# EAGLE board PCB (EAGLE 9.7.0)
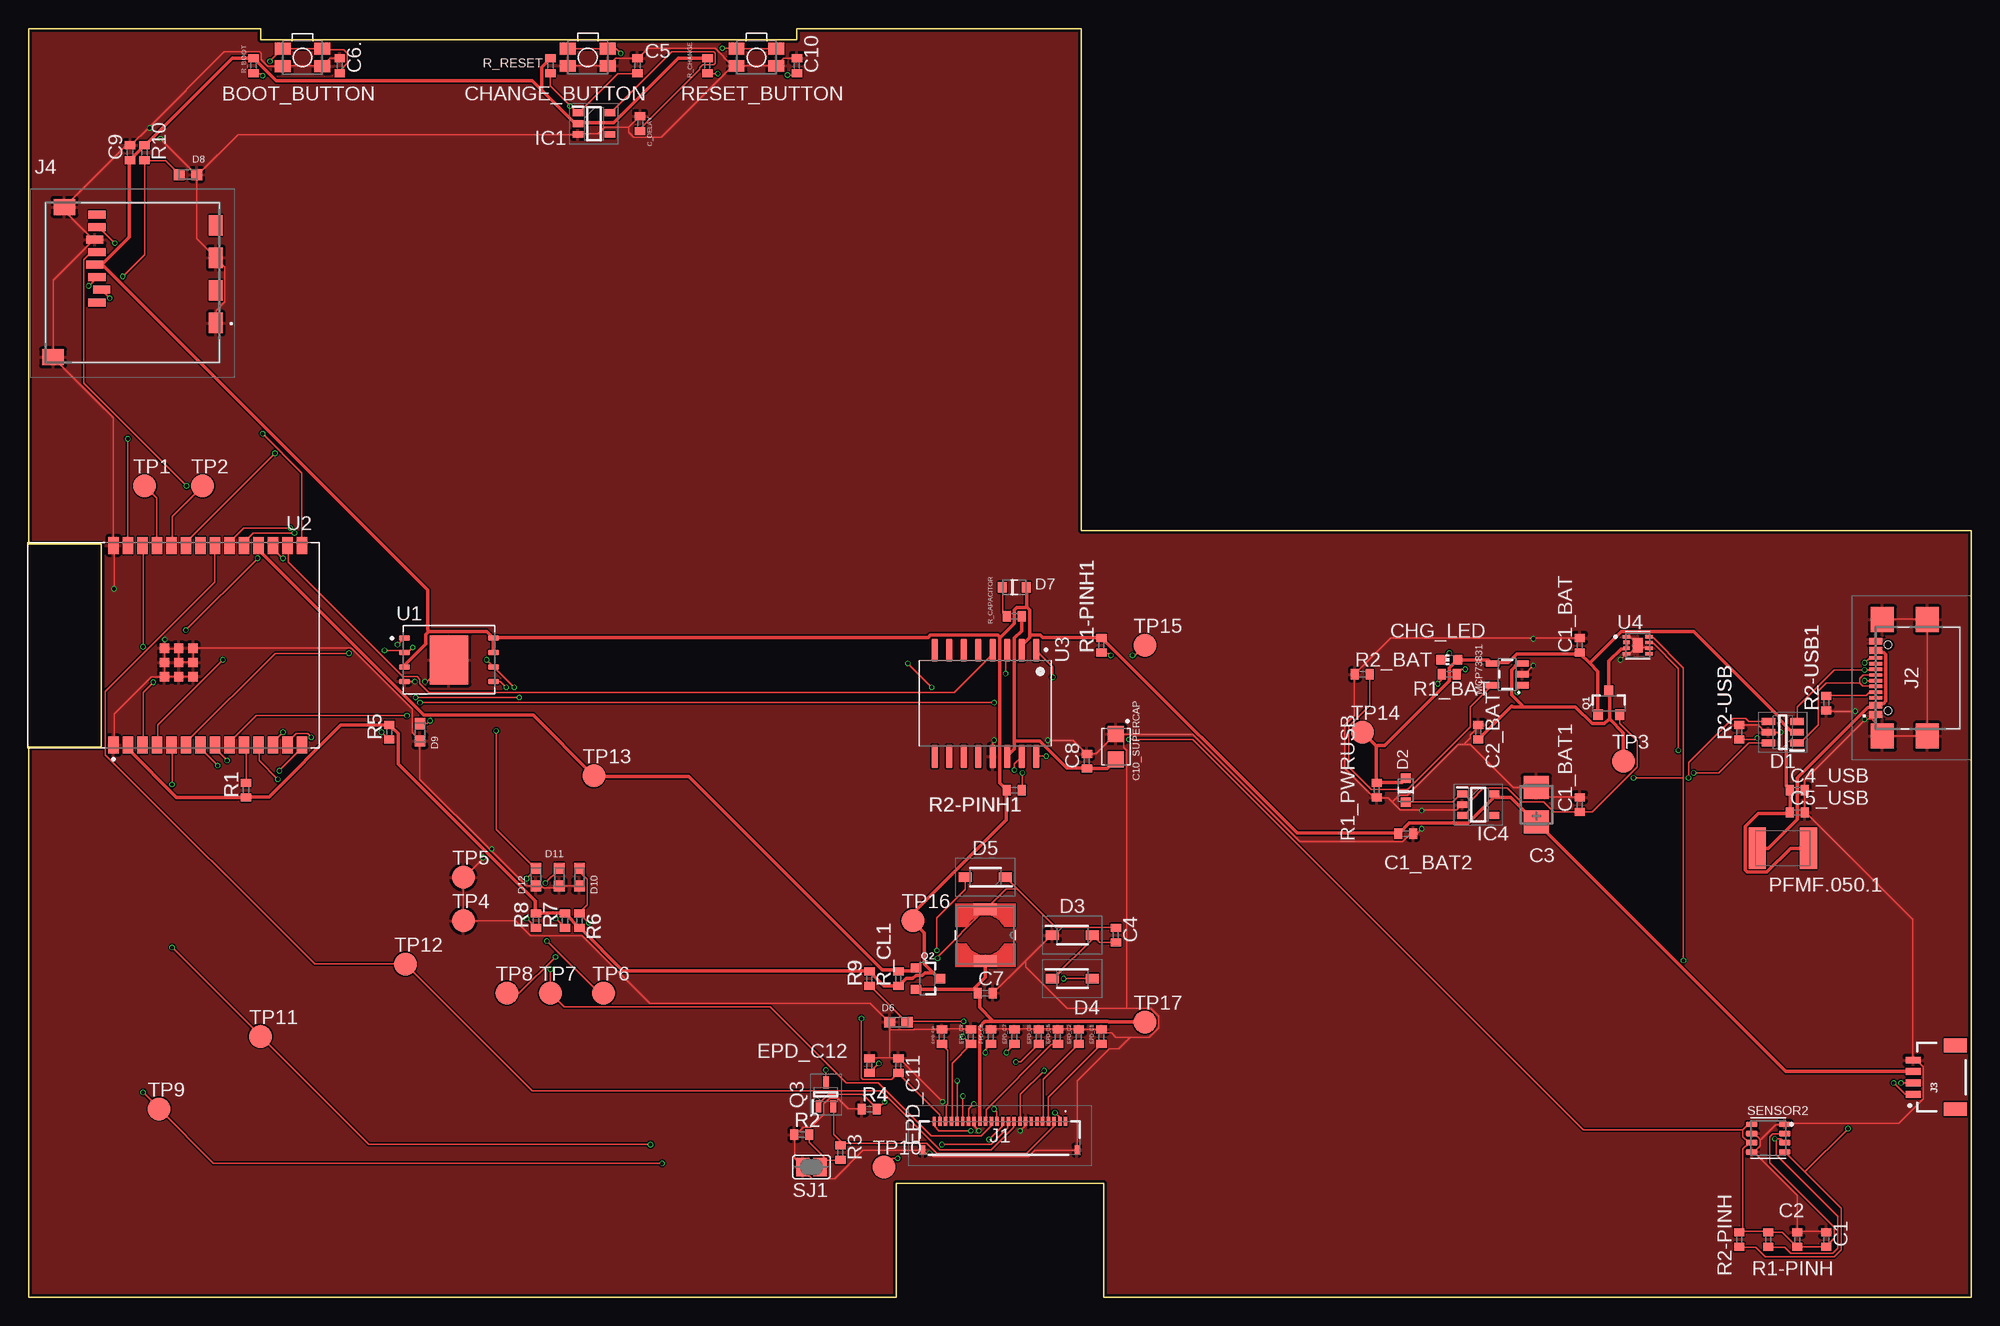
[diagram p0: board, top side]
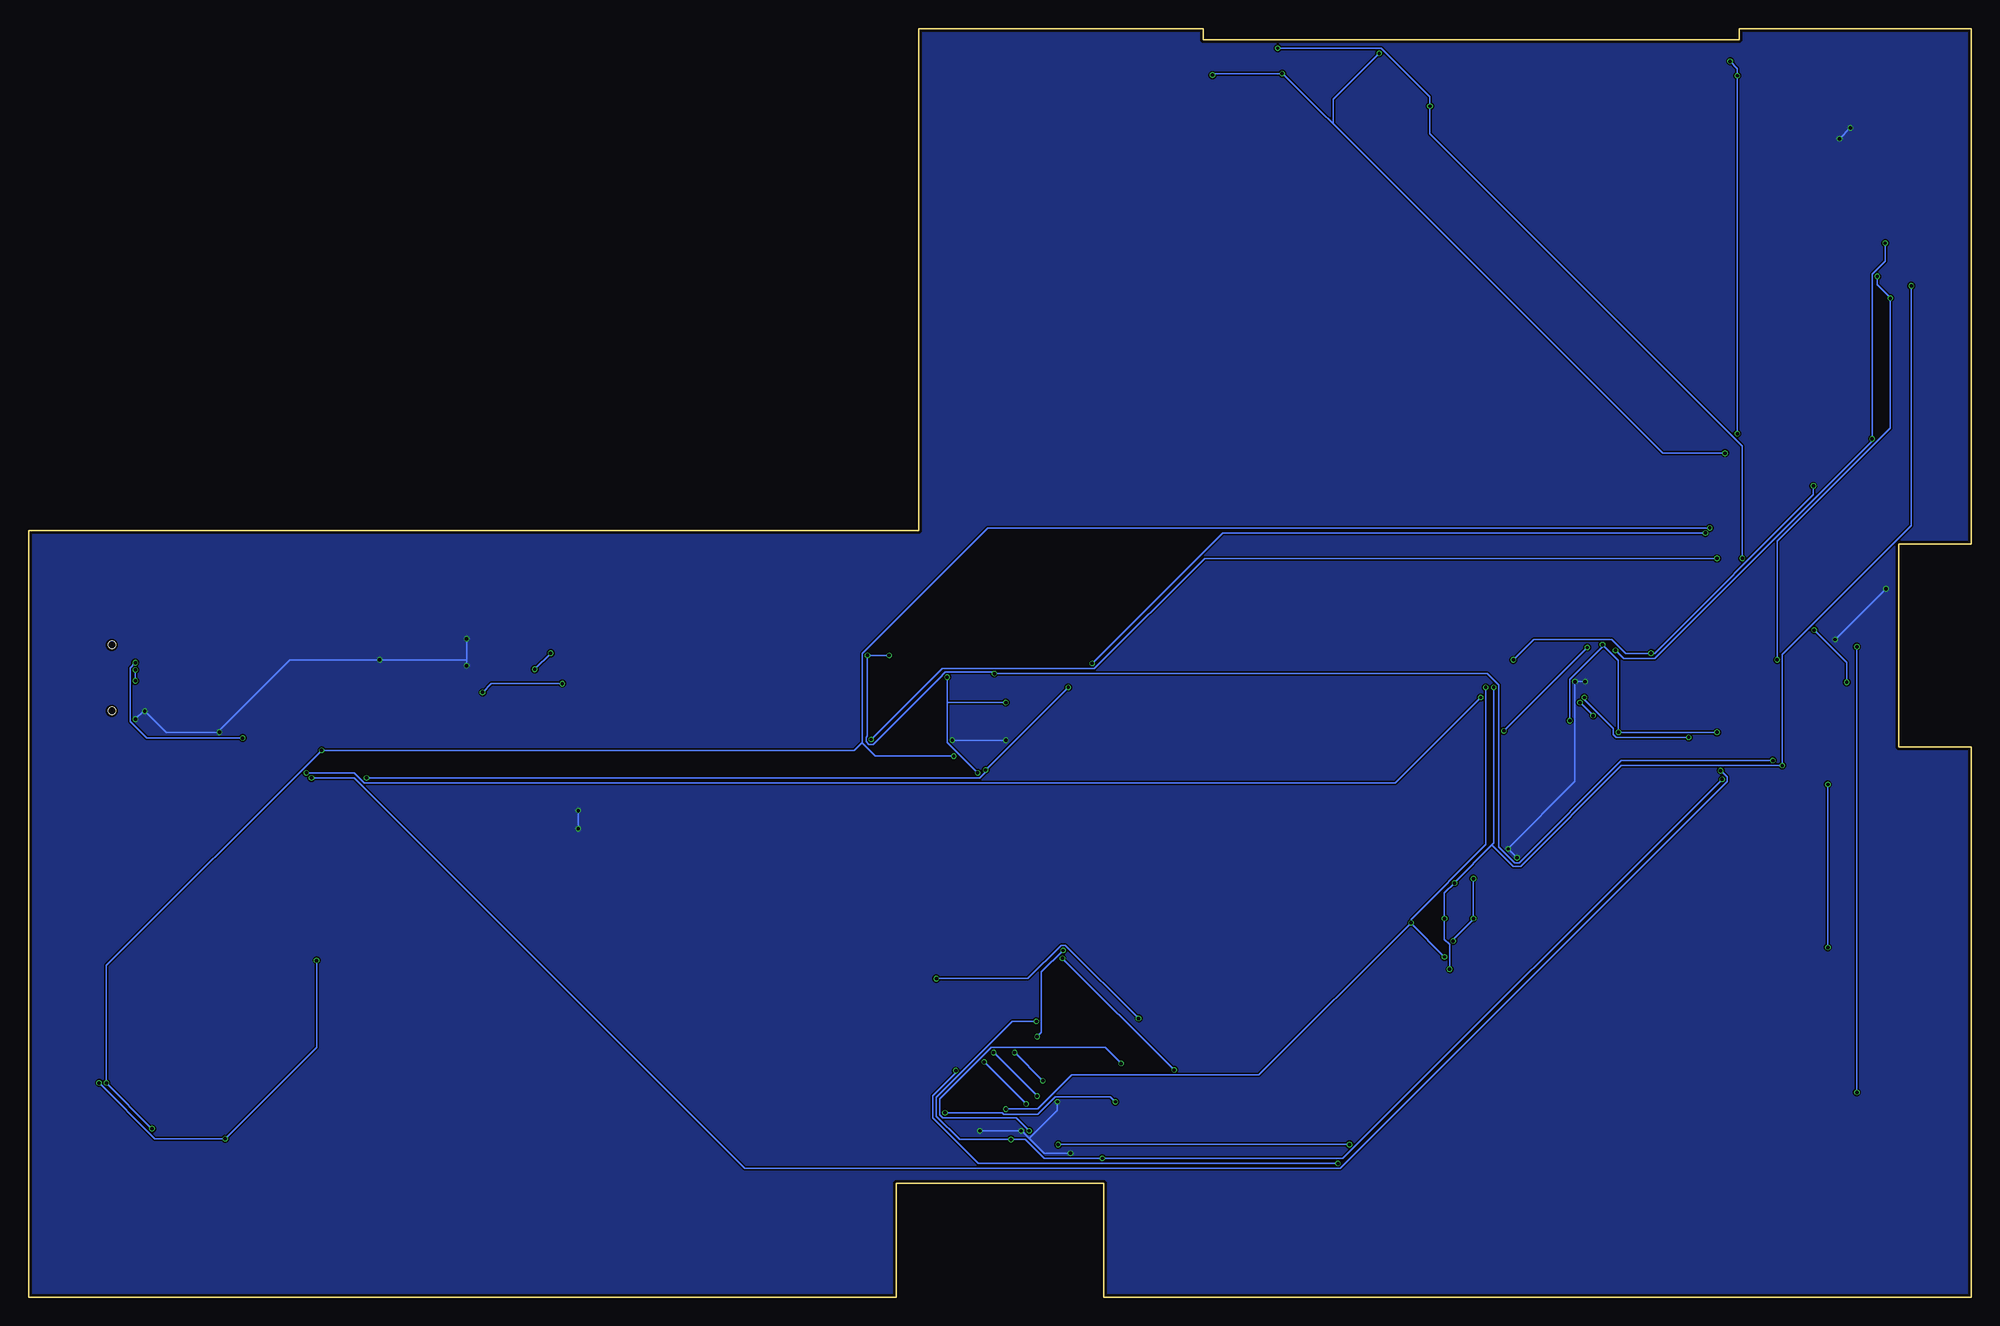
[diagram p1: board, bottom side, seen from below]

Size 170.2 x 111.2 mm. Coordinates in mm from the lower left corner, seen from the top.
Outline: 20.32,110.22 67.31,110.22 67.31,111.2 92.2,111.2 92.2,67.2 170.2,67.2 170.2,0 94.2,0 94.2,10 76,10 76,0 0,0 0,48.26 6.35,48.26 6.35,66.04 0,66.04 0,111.2 20.32,111.2 20.32,110.22
Copper layers (1*16): Top 0.035mm / dielectric 1.6mm / Bottom 0.035mm
Design rules "jlcpcb-2layers.dru": minimum track width 5mil, minimum drill 0.3mm, track to track 5mil, track to pad 5mil, pad to pad 5mil, via to via 5mil, smd to smd 5mil, copper to edge 0.2mm, drill to drill 6mil, minimum pad ring 10mil, minimum via ring 3mil, stop-mask expansion 4mil, vias tented up to drill 0mil, thermal gap 10mil
Net classes: 1 power: width 0.3 mm; 2 normal: width 0.15 mm

## Footprints (pad centres in the part's own frame; a part is rotated, then mirrored left to right if it is on the bottom)
MYBUTTON = smd 1.4 x 1.05: 1 1.75,0.75; 2 -1.75,0.75; 3 -1.75,-0.75; 4 1.75,-0.75
ESP32_WROVER_EAGLE-LTSPICE_C0402 = smd 0.7 x 0.9: 1 -0.65,0; 2 0.65,0
RCL_CT3528 = smd 2 x 2.2: + -1.5,0; - 1.5,0
CAPCP3225X100N = smd 1.4 x 1.4: 1 -1.1,0; 2 1.1,0
ADAFRUIT_CHIP-LED0603 = smd 0.8 x 0.8: A 0,-0.75; C 0,0.75
SOT95P280X145-6N = smd 1.2 x 0.6: 1 -1.25,0.95; 2 -1.25,0; 3 -1.25,-0.95; 4 1.25,-0.95; 5 1.25,0; 6 1.25,0.95
ESP32_WROVER_AVX---SD0805S020S1R0_AVX_SD0805S020S1R0_0 = smd 0.8 x 0.9: 1 -1.05,0; 2 1.05,0
SOD3716X135N = smd 1.15 x 0.8: 1 -1.75,0; 2 1.75,0
DIOC1608X36N = smd 0.97 x 0.94: 1 -0.75,0; 2 0.75,0
SOT95P280X125-5N = smd 0.9 x 0.6: 1 -1.4,0.95; 2 -1.4,0; 3 -1.4,-0.95; 4 1.4,-0.95; 5 1.4,0.95
SOT95P280X120-5N = smd 0.9 x 0.6: 1 -1.4,0.95; 2 -1.4,0; 3 -1.4,-0.95; 4 1.4,-0.95; 5 1.4,0.95
FH34SRJ24S05SH99 = smd 0.3 x 0.8: 1 5.75,1.45; 2 5.25,1.45; 3 4.75,1.45; 4 4.25,1.45; 5 3.75,1.45; 6 3.25,1.45; 7 2.75,1.45; 8 2.25,1.45; 9 1.75,1.45; 10 1.25,1.45; 11 0.75,1.45; 12 0.25,1.45; 13 -0.25,1.45; 14 -0.75,1.45; 15 -1.25,1.45; 16 -1.75,1.45; 17 -2.25,1.45; 18 -2.75,1.45; 19 -3.25,1.45; 20 -3.75,1.45; 21 -4.25,1.45; 22 -4.75,1.45; 23 -5.25,1.45; 24 -5.75,1.45 | smd 0.4 x 0.8: MP1 6.75,-1.05; MP2 -6.75,-1.05
SAMACSYS_PARTS_USB4110GFA = smd 0.3 x 1.15: A1 -3.35,3.678; A4 -2.55,3.678; A5 -1.25,3.678; A6 -0.25,3.678; A7 0.25,3.678; A8 1.25,3.678; A9 2.55,3.678; A12 3.35,3.678; B1 3.05,3.678; B4 2.25,3.678; B5 1.75,3.678; B6 0.75,3.678; B7 -0.75,3.678; B8 -1.75,3.678; B9 -2.25,3.678; B12 -3.05,3.678 | smd 2.18 x 2: MP1 -5.11,-0.827; MP2 5.11,-0.827; MP3 -5.11,3.103; MP4 5.11,3.103 | hole 0.65: -2.89,2.603; 2.89,2.603
JST04_1MM_RA = smd 0.6 x 1.35: 1 -1.5,0; 2 -0.5,0; 3 0.5,0; 4 1.5,0 | smd 1.2 x 2: NC1 2.8,-3.675; NC2 -2.8,-3.675
112ATAARR03ATTEND = smd 1.8 x 1.2: G1 10.6,10.4; G2 4.9,10.4; S1 7.75,10.4; S2 2.05,10.4 | smd 1.4 x 1.9: G3 13.6,-3.85; G4 0.45,-2.85 | smd 0.7 x 1.5: P1 8.8,0; P2 7.7,0.4; P3 6.6,0; P4 5.5,-0.2; P5 4.4,0; P6 3.3,-0.2; P7 2.2,0; P8 1.1,0
IND_4828-WE-TPC_WRE = smd 1.016 x 2.032: 1 -2.286,0; 2 2.286,0
ESP32_WROVER_SPARKFUN-IC-POWER_SOT23-5 = smd 0.55 x 1.2: 1 -0.95,-1.3; 2 0,-1.3; 3 0.95,-1.3; 4 0.95,1.3; 5 -0.95,1.3
ESP32C6_VARISTOR_CT/CN1812 = smd 1.5 x 3.6: 1 -2.25,0; 2 2.25,0
ESP32_WROVER_SPARKFUN-DISCRETESEMI_SOT23-3 = smd 0.8 x 0.9: 1 -0.95,-1; 2 0.95,-1; 3 0,1.1
SOT65P210X110-3N = smd 1.05 x 0.5: 1 -1.05,0.65; 2 -1.05,-0.65; 3 1.05,0
ESP32_WROVER_EAGLE-LTSPICE_R0402 = smd 0.7 x 0.9: 1 -0.65,0; 2 0.65,0
ESP32_WROVER_BME680_PSON80P300X300X100-8N = smd 1.016 x 0.5: 1 1.458,1.2; 2 1.458,0.4; 3 1.458,-0.4; 4 1.458,-1.2; 5 -1.458,-1.22; 6 -1.458,-0.4; 7 -1.458,0.4; 8 -1.458,1.2
SJ = smd 1.168 x 1.6: 1 -0.762,0; 2 0.762,0
TP20R = smd 2 x 2: TP 0,0
SON127P600X800X80-9N = smd 0.94 x 0.44: 1 -3.895,1.905; 2 -3.895,0.635; 3 -3.895,-0.635; 4 -3.895,-1.905; 5 3.895,-1.905; 6 3.895,-0.635; 7 3.895,0.635; 8 3.895,1.905 | smd 3.4 x 4.3: 9 0,0
XCVR_ESP32-C6-WROOM-1-N8 = smd 1.5 x 0.9: 1 -8.75,5.26; 2 -8.75,3.99; 3 -8.75,2.72; 4 -8.75,1.45; 5 -8.75,0.18; 6 -8.75,-1.09; 7 -8.75,-2.36; 8 -8.75,-3.63; 9 -8.75,-4.9; 10 -8.75,-6.17; 11 -8.75,-7.44; 12 -8.75,-8.71; 13 -8.75,-9.98; 14 -8.75,-11.25; 15 8.75,-11.25; 16 8.75,-9.98; 17 8.75,-8.71; 18 8.75,-7.44; 19 8.75,-6.17; 20 8.75,-4.9; 21 8.75,-3.63; 22 8.75,-2.36; 23 8.75,-1.09; 24 8.75,0.18; 25 8.75,1.45; 26 8.75,2.72; 27 8.75,3.99; 28 8.75,5.26 | smd 0.8 x 0.8: 29_1 -2.755,0.79; 29_2 -1.505,0.79; 29_3 -0.255,0.79; 29_4 -2.755,-0.46; 29_5 -1.505,-0.46; 29_6 -0.255,-0.46; 29_7 -2.755,-1.71; 29_8 -1.505,-1.71; 29_9 -0.255,-1.71
SOIC127P1032X265-16N = smd 2.05 x 0.59: 1 -4.655,4.445; 2 -4.655,3.175; 3 -4.655,1.905; 4 -4.655,0.635; 5 -4.655,-0.635; 6 -4.655,-1.905; 7 -4.655,-3.175; 8 -4.655,-4.445; 9 4.655,-4.445; 10 4.655,-3.175; 11 4.655,-1.905; 12 4.655,-0.635; 13 4.655,0.635; 14 4.655,1.905; 15 4.655,3.175; 16 4.655,4.445
SON50P200X200X80-9N = smd 0.76 x 0.27: 1 -0.985,0.75; 4 -0.985,-0.75; 5 0.985,-0.75; 6 0.985,-0.25; 7 0.985,0.25; 8 0.985,0.75 | smd 0.61 x 0.305: 2 -0.985,0.25; 3 -0.985,-0.25 | smd 0.9 x 1.3: 9 0,0

## Placement (x,y rotation side)
BOOT_BUTTON  BUTTON_CUSYOMV1  [MYBUTTON]  24,108.66 180 top
C1  100nF  [ESP32_WROVER_EAGLE-LTSPICE_C0402]  157.48,5.08 90 top
C1_BAT  4.7nF  [ESP32_WROVER_EAGLE-LTSPICE_C0402]  135.89,57.15 90 top
C1_BAT1  4.7uF  [ESP32_WROVER_EAGLE-LTSPICE_C0402]  135.89,43.18 90 top
C1_BAT2  4.7nF  [ESP32_WROVER_EAGLE-LTSPICE_C0402]  120.65,40.64 0 top
C2  100nF  [ESP32_WROVER_EAGLE-LTSPICE_C0402]  154.94,5.08 90 top
C2_BAT  4.7nF  [ESP32_WROVER_EAGLE-LTSPICE_C0402]  127,49.53 90 top
C3  100nF  [RCL_CT3528]  132.08,43.18 90 top
C4  4.7uF/25V  [ESP32_WROVER_EAGLE-LTSPICE_C0402]  95.25,31.75 90 top
C4_USB  100nF  [ESP32_WROVER_EAGLE-LTSPICE_C0402]  154.94,44.45 0 top
C5  1uF  [ESP32_WROVER_EAGLE-LTSPICE_C0402]  53.34,107.95 90 top
C5_USB  4.7uF  [ESP32_WROVER_EAGLE-LTSPICE_C0402]  154.94,42.5 0 top
C6.  100nF  [ESP32_WROVER_EAGLE-LTSPICE_C0402]  27.27,107.95 90 top
C7  10uF  [ESP32_WROVER_EAGLE-LTSPICE_C0402]  83.82,26.67 0 top
C8  100nF  [ESP32_WROVER_EAGLE-LTSPICE_C0402]  92.71,46.99 90 top
C9  100nF  [ESP32_WROVER_EAGLE-LTSPICE_C0402]  8.89,100.33 90 top
C10  100nF  [ESP32_WROVER_EAGLE-LTSPICE_C0402]  67.31,107.95 90 top
C10_SUPERCAP  CPH3225A  [CAPCP3225X100N]  95.25,48.26 270 top
C_DELAY  100nF  [ESP32_WROVER_EAGLE-LTSPICE_C0402]  53.57,102.87 90 top
CHANGE_BUTTON  BUTTON_CUSYOMV1  [MYBUTTON]  49,108.67 180 top
CHG_LED  [ADAFRUIT_CHIP-LED0603]  124.46,55.88 90 top
D1  USBLC6-2SC6Y  [SOT95P280X145-6N]  153.67,49.53 180 top
D2  ESP32_WROVER_AVX---SD0805S020S1R0_AVX_SD0805S020S1R0_0_0AVX_SD0805S020S1R0_0_0  [ESP32_WROVER_AVX---SD0805S020S1R0_AVX_SD0805S020S1R0_0]  120.65,44.45 90 top
D3  MBR0530  [SOD3716X135N]  91.44,31.75 0 top
D4  MBR0530  [SOD3716X135N]  91.44,27.94 0 top
D5  MBR0530  [SOD3716X135N]  83.82,36.83 180 top
D6  PGB1010603MR  [DIOC1608X36N]  76.2,24.13 0 top
D7  SD0805S020S1R0  [ESP32_WROVER_AVX---SD0805S020S1R0_AVX_SD0805S020S1R0_0]  86.36,62.23 0 top
D8  PGB1010603MR  [DIOC1608X36N]  13.97,98.4 180 top
D9  PGB1010603MR  [DIOC1608X36N]  34.29,49.53 90 top
D10  PGB1010603MR  [DIOC1608X36N]  48.26,36.83 90 top
D11  PGB1010603MR  [DIOC1608X36N]  46.5,36.83 90 top
D12  PGB1010603MR  [DIOC1608X36N]  44.45,36.83 90 top
EPD_C1  1uF/50V  [ESP32_WROVER_EAGLE-LTSPICE_C0402]  93.98,22.86 90 top
EPD_C2  1uF/50V  [ESP32_WROVER_EAGLE-LTSPICE_C0402]  92,22.86 90 top
EPD_C5  0.1uF/50V  [ESP32_WROVER_EAGLE-LTSPICE_C0402]  90.17,22.86 90 top
EPD_C6  1uF/50V  [ESP32_WROVER_EAGLE-LTSPICE_C0402]  88.5,22.86 90 top
EPD_C7  1uF/50V  [ESP32_WROVER_EAGLE-LTSPICE_C0402]  86.36,22.86 90 top
EPD_C8  1uF/50V  [ESP32_WROVER_EAGLE-LTSPICE_C0402]  84.3,22.86 90 top
EPD_C9  [ESP32_WROVER_EAGLE-LTSPICE_C0402]  82.55,22.86 90 top
EPD_C10  1uF/50V  [ESP32_WROVER_EAGLE-LTSPICE_C0402]  80.01,22.86 90 top
EPD_C11  1uF/50V  [ESP32_WROVER_EAGLE-LTSPICE_C0402]  76.2,20.32 90 top
EPD_C12  1uF/50V  [ESP32_WROVER_EAGLE-LTSPICE_C0402]  73.66,20.32 90 top
IC1  BD5229G-TR  [SOT95P280X125-5N]  49.53,102.87 0 top
IC4  XC6220A331MR-G  [SOT95P280X120-5N]  127,43.18 0 top
J1  FH34SRJ-24S-0.5SH_99_  [FH34SRJ24S05SH99]  85.09,13.97 0 top
J2  SAMACSYS_PARTS_USB4110-GF-A  [SAMACSYS_PARTS_USB4110GFA]  165.5,54.3 90 top
J3  QWIIC_RIGHT_ANGLE  [JST04_1MM_RA]  165.1,19.3 90 top
J4  112A-TAAR-R03_ATTEND  [112ATAARR03ATTEND]  6,96 270 top
L1  68uH  [IND_4828-WE-TPC_WRE]  83.82,31.75 270 top
MCP73831  MCP73831  [ESP32_WROVER_SPARKFUN-IC-POWER_SOT23-5]  129.54,54.61 90 top
PFMF.050.1  ESP32C6_VARISTORCN1812  [ESP32C6_VARISTOR_CT/CN1812]  153.67,39.37 0 top
Q1  20V/4.2A/52mΩ/1.4W  [ESP32_WROVER_SPARKFUN-DISCRETESEMI_SOT23-3]  138.43,52.07 0 top
Q2  20V/4.2A/52mΩ/1.4W  [ESP32_WROVER_SPARKFUN-DISCRETESEMI_SOT23-3]  78.74,27.94 270 top
Q3  SI1308EDL-T1-GE3  [SOT65P210X110-3N]  69.85,17.78 90 top
R1  10K  [ESP32_WROVER_EAGLE-LTSPICE_R0402]  19.05,44.45 90 top
R1-PINH  10K  [ESP32_WROVER_EAGLE-LTSPICE_R0402]  152.4,5.08 90 top
R1-PINH1  10K  [ESP32_WROVER_EAGLE-LTSPICE_R0402]  93.98,57.15 90 top
R1_BAT  200  [ESP32_WROVER_EAGLE-LTSPICE_R0402]  124.46,54.61 0 top
R1_PWRUSB  100K  [ESP32_WROVER_EAGLE-LTSPICE_R0402]  118.11,44.45 90 top
R2  2.2  [ESP32_WROVER_EAGLE-LTSPICE_R0402]  67.73,14.27 0 top
R2-PINH  10K  [ESP32_WROVER_EAGLE-LTSPICE_R0402]  149.86,5.08 90 top
R2-PINH1  10K  [ESP32_WROVER_EAGLE-LTSPICE_R0402]  86.36,44.45 180 top
R2-USB  5K1  [ESP32_WROVER_EAGLE-LTSPICE_R0402]  149.86,49.53 90 top
R2-USB1  5K1  [ESP32_WROVER_EAGLE-LTSPICE_R0402]  157.48,52.07 90 top
R2_BAT  2K  [ESP32_WROVER_EAGLE-LTSPICE_R0402]  116.84,54.61 0 top
R3  0.47  [ESP32_WROVER_EAGLE-LTSPICE_R0402]  71.12,12.7 90 top
R4  10K  [ESP32_WROVER_EAGLE-LTSPICE_R0402]  73.66,16.51 0 top
R5  10K  [ESP32_WROVER_EAGLE-LTSPICE_R0402]  31.6,49.53 90 top
R6  10K  [ESP32_WROVER_EAGLE-LTSPICE_R0402]  48.26,33.02 270 top
R7  10K  [ESP32_WROVER_EAGLE-LTSPICE_R0402]  46.99,33.02 90 top
R8  10K  [ESP32_WROVER_EAGLE-LTSPICE_R0402]  44.45,33.02 90 top
R9  10K  [ESP32_WROVER_EAGLE-LTSPICE_R0402]  73.66,27.94 90 top
R10  10K  [ESP32_WROVER_EAGLE-LTSPICE_R0402]  10.16,100.33 90 top
R_BOOT  10K  [ESP32_WROVER_EAGLE-LTSPICE_R0402]  19.7,107.95 90 top
R_CAPACITOR  15  [ESP32_WROVER_EAGLE-LTSPICE_R0402]  86.36,59.69 0 top
R_CHANGE  10K  [ESP32_WROVER_EAGLE-LTSPICE_R0402]  59.47,107.95 90 top
R_CL1  10K  [ESP32_WROVER_EAGLE-LTSPICE_R0402]  76.2,27.94 90 top
R_RESET  10K  [ESP32_WROVER_EAGLE-LTSPICE_R0402]  45.72,107.95 90 top
RESET_BUTTON  BUTTON_CUSYOMV1  [MYBUTTON]  63.77,108.67 180 top
SENSOR2  BME680  [ESP32_WROVER_BME680_PSON80P300X300X100-8N]  152.4,13.97 0 top
SJ1  [SJ]  68.58,11.43 0 top
TP1  TPTP20R  [TP20R]  10.16,71.12 0 top
TP2  TPTP20R  [TP20R]  15.24,71.12 0 top
TP3  TPTP20R  [TP20R]  139.7,46.99 0 top
TP4  TPTP20R  [TP20R]  38.1,33.02 0 top
TP5  TPTP20R  [TP20R]  38.1,36.83 0 top
TP6  TPTP20R  [TP20R]  50.39,26.67 0 top
TP7  TPTP20R  [TP20R]  45.72,26.67 0 top
TP8  TPTP20R  [TP20R]  41.91,26.67 0 top
TP9  TPTP20R  [TP20R]  11.43,16.51 0 top
TP10  TPTP20R  [TP20R]  74.93,11.43 0 top
TP11  TPTP20R  [TP20R]  20.32,22.86 0 top
TP12  TPTP20R  [TP20R]  33.02,29.21 0 top
TP13  TPTP20R  [TP20R]  49.53,45.72 0 top
TP14  TPTP20R  [TP20R]  116.84,49.53 0 top
TP15  TPTP20R  [TP20R]  97.79,57.15 0 top
TP16  TPTP20R  [TP20R]  77.47,33.02 0 top
TP17  TPTP20R  [TP20R]  97.79,24.13 0 top
U1  W25Q512JVEIQ  [SON127P600X800X80-9N]  36.83,55.88 0 top
U2  ESP32-C6-WROOM-1-N8  [XCVR_ESP32-C6-WROOM-1-N8]  12.7,57.15 90 top
U3  DS3231SN#  [SOIC127P1032X265-16N]  83.82,52.07 270 top
U4  MAX17048G+T10  [SON50P200X200X80-9N]  140.97,57.15 0 top

## Library data of the parts
BOOT_BUTTON CHANGE_BUTTON CHG_LED PFMF.050.1 RESET_BUTTON SJ1 TP1-TP17 = DeskAssistant v19 v1
C1 C1_BAT C1_BAT1 C1_BAT2 C2 C2_BAT C4 C4_USB C5 C5_USB C6. C7-C10 C_DELAY EPD_C1 EPD_C2 EPD_C5-EPD_C12 = DeskAssistant v19 v1; SPICEMODEL: NONE; SPICEPREFIX: C
C3 = DeskAssistant v19 v1; SPICEPREFIX: C
C10_SUPERCAP = DeskAssistant v19 v1; AVAILABILITY: Not in stock; CHECK_PRICES: https://www.snapeda.com/parts/CPH3225A/Seiko+Instruments/view-part/?ref=eda; DESCRIPTION: 11 mF (EDLC) Supercapacitor 3.3 V 1210 (3225 Metric) - -; MF: Seiko Instruments; MP: CPH3225A; PACKAGE: 1210 Seiko; PRICE: None; PURCHASE-URL: https://www.snapeda.com/api/url_track_click_mouser/?unipart_id=562593&manufacturer=Seiko Instruments&part_name=CPH3225A&search_term=None; SNAPEDA_LINK: https://www.snapeda.com/parts/CPH3225A/Seiko+Instruments/view-part/?ref=snap
D1 = DeskAssistant v19 v1; AVAILABILITY: In Stock; CHECK_PRICES: https://www.snapeda.com/parts/USBLC6-2SC6Y/STMicroelectronics/view-part/?ref=eda; DESCRIPTION: 17V Clamp 5A (8/20µs) Ipp Tvs Diode Surface Mount SOT-23-6; MF: STMicroelectronics; MP: USBLC6-2SC6Y; PACKAGE: SOT-23-6 STMicroelectronics; PRICE: None; SNAPEDA_LINK: https://www.snapeda.com/parts/USBLC6-2SC6Y/STMicroelectronics/view-part/?ref=snap
D2 D7 = DeskAssistant v19 v1; CENTROID_NOT_SPECIFIED: No; DATASHEET: http://datasheets.avx.com/schottky.pdf; DIGIKEY_DESCRIPTION: DIODE SCHOTTKY 20V 1A 0805; DIGIKEY_PART_NUMBER: 478-7800-1-ND; LEAD_FREE: yes; MF: AVX; MOUSER_PART_NUMBER: 581-SD0805S020S1R0; PACKAGE: 0805 (2012 metric); PREFIX: D; ROHS: yes; TEMPERATURE_RANGE_HIGH: +125°C; TEMPERATURE_RANGE_LOW: -55°C
D3-D5 = DeskAssistant v19 v1; AVAILABILITY: In Stock; CHECK_PRICES: https://www.snapeda.com/parts/MBR0530/Onsemi/view-part/?ref=eda; DESCRIPTION: Diode Schottky 30 V 500mA Surface Mount SOD-123; MF: ON Semiconductor; MP: MBR0530; PACKAGE: SOD-123-2 ON Semiconductor; PRICE: None; PURCHASE-URL: https://www.snapeda.com/api/url_track_click_mouser/?unipart_id=179458&manufacturer=ON Semiconductor&part_name=MBR0530&search_term=None; SNAPEDA_LINK: https://www.snapeda.com/parts/MBR0530/Onsemi/view-part/?ref=snap
D6 D8-D12 = DeskAssistant v19 v1; AVAILABILITY: In Stock; CHECK_PRICES: https://www.snapeda.com/parts/PGB1010603MR/Littelfuse/view-part/?ref=eda; DESCRIPTION: 150V (Typ) Clamp - Ipp Tvs Diode Surface Mount 0603 (1608 Metric); MF: Littelfuse Inc.; MP: PGB1010603MR; PACKAGE: 0603 Littelfuse Inc.; PRICE: None; PURCHASE-URL: https://www.snapeda.com/api/url_track_click_mouser/?unipart_id=5659453&manufacturer=Littelfuse Inc.&part_name=PGB1010603MR&search_term=None; SNAPEDA_LINK: https://www.snapeda.com/parts/PGB1010603MR/Littelfuse/view-part/?ref=snap
IC1 = DeskAssistant v19 v1; DESCRIPTION: Voltage Detector with Adjustable Delay Time: CMOS processes are utilized to develop high precision, low current consumption CMOS reset ICs that allow arbitrary setting of the delay time. The extensive lineup includes both Nch Open Drain and CMOS output types in a wide range of detection voltages (from 2.3V to 6.0V, in 0.1V steps), enabling selection of the ideal solution based on customer requirements. In addition, the entire series is of course both lead-free and RoHS-compliant.; HEIGHT: 1.25mm; MANUFACTURER_NAME: ROHM Semiconductor; MANUFACTURER_PART_NUMBER: BD5229G-TR; MOUSER_PART_NUMBER: 755-BD5229G-TR; MOUSER_PRICE-STOCK: https://www.mouser.co.uk/ProductDetail/ROHM-Semiconductor/BD5229G-TR?qs=4kLU8WoGk0vvnhrrYwdszw%3D%3D
IC4 = DeskAssistant v19 v1; DESCRIPTION: LDO Voltage Regulators; HEIGHT: 1.2mm; MANUFACTURER_NAME: Torex; MANUFACTURER_PART_NUMBER: XC6220A331MR-G; MOUSER_PART_NUMBER: 865-XC6220A331MR-G; MOUSER_PRICE-STOCK: https://www.mouser.co.uk/ProductDetail/Torex-Semiconductor/XC6220A331MR-G?qs=AsjdqWjXhJ8ZSWznL1J0gg%3D%3D
J1 = DeskAssistant v19 v1; DESCRIPTION: 24 Position FFC, FPC Connector Contacts, Top and Bottom 0.020" (0.50mm) Surface Mount, Right Angle; HEIGHT: 1.1mm; MANUFACTURER_NAME: Hirose; MANUFACTURER_PART_NUMBER: FH34SRJ-24S-0.5SH(99); MOUSER_PART_NUMBER: 798-FH34SRJ24S05SH99; MOUSER_PRICE-STOCK: https://www.mouser.co.uk/ProductDetail/Hirose-Connector/FH34SRJ-24S-0.5SH99?qs=vcbW%252B4%252BSTIpKBl5ap9J8Fw%3D%3D
J2 = DeskAssistant v19 v1; DESCRIPTION: CONN USB 2.0 TYPE-C R/A SMT; HEIGHT: 3.26mm; MANUFACTURER_NAME: GCT (GLOBAL CONNECTOR TECHNOLOGY); MANUFACTURER_PART_NUMBER: USB4110-GF-A; MOUSER_PART_NUMBER: 640-USB4110-GF-A; MOUSER_PRICE-STOCK: https://www.mouser.co.uk/ProductDetail/GCT/USB4110-GF-A?qs=KUoIvG%2F9IlYiZvIXQjyJeA%3D%3D
J3 = DeskAssistant v19 v1; PROD_ID: CONN-13694
J4 = DeskAssistant v19 v1; DESCRIPTION: Micro SD Card Socket, Push-Push Type, Top Mount, SMT, H=1.83mm, 10u; HEIGHT: 1.9mm; MANUFACTURER_NAME: ATTEND; MANUFACTURER_PART_NUMBER: 112A-TAAR-R03 ATTEND
L1 = DeskAssistant v19 v1; COPYRIGHT: Copyright (C) 2024 Ultra Librarian. All rights reserved.; MANUFACTURER_PART_NUMBER: 744043680; MFR_NAME: Wurth Electronics
MCP73831 = DeskAssistant v19 v1; PROD_ID: IC-09995
Q1 Q2 = DeskAssistant v19 v1; PROD_ID: TRAN-14388
Q3 = DeskAssistant v19 v1; AVAILABILITY: In Stock; CHECK_PRICES: https://www.snapeda.com/parts/SI1308EDL-T1-GE3/Vishay+Siliconix/view-part/?ref=eda; DESCRIPTION: Si1308EDL-T1-GE3 N-channel MOSFET Transistor, 1.5 A, 30 V, 3-Pin SC-70 | Siliconix / Vishay SI1308EDL-T1-GE3; MF: Vishay Siliconix; MP: SI1308EDL-T1-GE3; PACKAGE: SOT-323 Vishay Semiconductor; PRICE: None; PURCHASE-URL: https://www.snapeda.com/api/url_track_click_mouser/?unipart_id=274603&manufacturer=Vishay Siliconix&part_name=SI1308EDL-T1-GE3&search_term=None; SNAPEDA_LINK: https://www.snapeda.com/parts/SI1308EDL-T1-GE3/Vishay+Siliconix/view-part/?ref=snap
R1 R1-PINH R1-PINH1 R1_BAT R1_PWRUSB R2 R2-PINH R2-PINH1 R2-USB R2-USB1 R2_BAT R3-R10 R_BOOT R_CAPACITOR R_CHANGE R_CL1 R_RESET = DeskAssistant v19 v1; SPICEMODEL: NONE; SPICEPREFIX: R
SENSOR2 = DeskAssistant v19 v1; AVAILABILITY: Unavailable; DESCRIPTION: Integrated Environmental Unit; MF: Bosch Sensortec; MP: BME680; PACKAGE: LGA-8 Bosch Tools; PRICE: None
U1 = DeskAssistant v19 v1; AVAILABILITY: In Stock; CHECK_PRICES: https://www.snapeda.com/parts/W25Q512JVEIQ/Winbond+Electronics/view-part/?ref=eda; DESCRIPTION: FLASH - NOR Memory IC 512Mb (64M x 8) SPI - Quad I/O 133 MHz 8-WSON (8x6); MF: Winbond Electronics; MP: W25Q512JVEIQ; PACKAGE: Package; PRICE: None; SNAPEDA_LINK: https://www.snapeda.com/parts/W25Q512JVEIQ/Winbond+Electronics/view-part/?ref=snap
U2 = DeskAssistant v19 v1; AVAILABILITY: In Stock; CHECK_PRICES: https://www.snapeda.com/parts/ESP32-C6-WROOM-1-N8/Espressif+Systems/view-part/?ref=eda; DESCRIPTION: Multiprotocol Modules ESP32-C6 module, Wi-Fi 6 in 2.4 GHz band, Bluetooth 5, Zigbee 3.0 and Thread. ESP34-WROOM Compatible - ENGINEERING SAMPLE; MF: Espressif Systems; MP: ESP32-C6-WROOM-1-N8; PACKAGE: None; PRICE: None; SNAPEDA_LINK: https://www.snapeda.com/parts/ESP32-C6-WROOM-1-N8/Espressif+Systems/view-part/?ref=snap
U3 = DeskAssistant v19 v1; AVAILABILITY: In Stock; CHECK_PRICES: https://www.snapeda.com/parts/DS3231SN%23/Analog+Devices/view-part/?ref=eda; DESCRIPTION: Extremely Accurate I²C-Integrated RTC/TCXO/Crystal; MF: Analog Devices; MP: DS3231SN#; PACKAGE: SOIC-16 Maxim; PRICE: None; PURCHASE-URL: https://www.snapeda.com/api/url_track_click_mouser/?unipart_id=99048&manufacturer=Analog Devices&part_name=DS3231SN#&search_term=None; SNAPEDA_LINK: https://www.snapeda.com/parts/DS3231SN%23/Analog+Devices/view-part/?ref=snap
U4 = DeskAssistant v19 v1; AVAILABILITY: In Stock; CHECK_PRICES: https://www.snapeda.com/parts/MAX17048G+T10/Analog+Devices/view-part/?ref=eda; DESCRIPTION: 3µA 1-Cell/2-Cell Fuel Gauge with ModelGauge; MF: Analog Devices; MP: MAX17048G+T10; PACKAGE: TDFN-8 Maxim; PRICE: None; PURCHASE-URL: https://www.snapeda.com/api/url_track_click_mouser/?unipart_id=329239&manufacturer=Analog Devices&part_name=MAX17048G+T10&search_term=None; SNAPEDA_LINK: https://www.snapeda.com/parts/MAX17048G+T10/Analog+Devices/view-part/?ref=snap

## Nets
3V3 [power]: C1_BAT2.1 C3.+ C9.1 D7.2 IC1.2 IC4.5 J3.3 J4.P4 Q2.3 R1-PINH1.2 R1.1 R2-PINH1.2 R5.2 R6.2 R7.2 R8.2 R9.2 R10.2 R_BOOT.2 R_CHANGE.2 R_CL1.1 R_RESET.2 TP16.TP U1.3 U1.7 U1.8 U2.2 U3.2
32KHZ [normal]: R2-PINH1.1 U2.9 U3.1
DN [normal]: D1.1 J2.A7 J2.B7
DP [normal]: D1.3 J2.A6 J2.B6
EPD_3V3 [power]: C7.1 J1.16 L1.2 Q2.2 TP17.TP
EPD_3V3_C [power]: Q2.1 R_CL1.2 TP13.TP U2.18
EPD_BUSY [normal]: J1.9 TP9.TP U2.26
EPD_CS [normal]: D6.2 J1.12 R9.1 TP10.TP U2.11
EPD_DC [normal]: J1.11 TP11.TP U2.5
EPD_RST [normal]: J1.10 TP12.TP U2.21
FLASH_CS [normal]: D9.2 R5.1 U1.1 U2.12
GDR [normal]: J1.2 Q3.1 R4.2
GND [normal]: BOOT_BUTTON.1 BOOT_BUTTON.2 C1.2 C1_BAT1.2 C1_BAT2.2 C1_BAT.2 C2.2 C2_BAT.2 C3.- C4_USB.2 C5.2 C5_USB.2 C6..2 C7.2 C8.2 C9.2 C10.2 C10_SUPERCAP.1 C_DELAY.2 CHANGE_BUTTON.1 CHANGE_BUTTON.2 D1.5 D3.1 D6.1 D8.1 D9.1 D10.1 D11.1 D12.1 EPD_C1.2 EPD_C2.2 EPD_C5.2 EPD_C6.2 EPD_C7.2 EPD_C8.2 EPD_C9.2 EPD_C10.2 EPD_C11.2 EPD_C12.2 IC1.3 IC4.2 J1.8 J1.17 J1.MP1 J1.MP2 J2.A1 J2.A12 J2.B1 J2.B12 J2.MP1 J2.MP2 J2.MP3 J2.MP4 J3.4 J4.G1 J4.G2 J4.G3 J4.G4 J4.P6 MCP73831.2 R1_PWRUSB.1 R2-USB1.1 R2-USB.2 R2.1 R2_BAT.1 R4.1 RESET_BUTTON.1 RESET_BUTTON.2 SENSOR2.1 SENSOR2.5 SENSOR2.7 SJ1.1 TP4.TP TP5.TP U1.4 U1.9 U2.1 U2.28 U2.29_1 U2.29_2 U2.29_3 U2.29_4 U2.29_5 U2.29_6 U2.29_7 U2.29_8 U2.29_9 U3.13 U4.1 U4.4 U4.6 U4.9
GPIO8 [normal]: R1.2 U2.10
I2C_PW [normal]: C1.1 C2.1 R1-PINH.2 R2-PINH.2 SENSOR2.2 SENSOR2.6 SENSOR2.8 U2.17
INT_RTC [normal]: R1-PINH1.1 TP15.TP U2.8 U3.3
IO/BOOT [normal]: BOOT_BUTTON.3 BOOT_BUTTON.4 C6..1 R_BOOT.1 U2.15
IO/CHANGE [normal]: C10.1 CHANGE_BUTTON.3 CHANGE_BUTTON.4 R_CHANGE.1 U2.23
MISO [normal]: D12.2 J4.P7 R8.1 TP6.TP U1.2 U2.27
MOSI [normal]: D11.2 J1.14 J4.P3 R7.1 TP7.TP U1.5 U2.7
N$1 [normal]: J2.A5 R2-USB1.2
N$2 [normal]: J2.B5 R2-USB.1
N$3 [normal]: CHG_LED.C R1_BAT.2
N$4 [normal]: C1_BAT1.1 D2.1 IC4.1 IC4.3 Q1.2
N$5 [normal]: MCP73831.5 R2_BAT.2
N$6 [normal]: MCP73831.1 R1_BAT.1
N$7 [normal]: EPD_C5.1 J1.15
N$8 [normal]: EPD_C1.1 J1.4
N$9 [normal]: EPD_C6.1 J1.18
N$10 [normal]: C4.1 D3.2 D4.1
N$11 [normal]: EPD_C12.1 J1.24
N$12 [normal]: C_DELAY.1 IC1.5
N$13 [normal]: EPD_C10.1 J1.22
N$15 [normal]: EPD_C8.1 J1.20
N$16 [normal]: EPD_C7.1 J1.19
N$17 [normal]: EPD_C2.1 J1.5
N$18 [normal]: D7.1 R_CAPACITOR.1
PREVGH [normal]: D5.2 EPD_C9.1 J1.21
PREVGL [normal]: D4.2 EPD_C11.1 J1.23
RESE [normal]: J1.3 Q3.2 R3.2
RESE' [normal]: R2.2 R3.1 SJ1.2
RESET [normal]: C5.1 IC1.1 R_RESET.1 RESET_BUTTON.3 RESET_BUTTON.4 U2.3
RTC_RST [normal]: U2.16 U3.4
RX [normal]: TP2.TP U2.24
SCK [normal]: D10.2 J1.13 J4.P5 R6.1 TP8.TP U1.6 U2.6
SCL [normal]: J3.1 R2-PINH.1 SENSOR2.4 U2.20 U3.16 U4.7
SDA [normal]: J3.2 R1-PINH.1 SENSOR2.3 U2.19 U3.15 U4.8
SRC [normal]: C4.2 D5.1 L1.1 Q3.3
SS_SD [normal]: D8.2 J4.P2 R10.1 U2.4
TX [normal]: TP1.TP U2.25
USB_D+ [normal]: D1.4 U2.14
USB_D- [normal]: D1.6 U2.13
VBAT [power]: C2_BAT.1 MCP73831.3 Q1.3 TP3.TP U4.2 U4.3
VBUS [power]: C1_BAT.1 C4_USB.1 C5_USB.1 CHG_LED.A D1.2 D2.2 MCP73831.4 PFMF.050.1.2 Q1.1 R1_PWRUSB.2 TP14.TP
VRTC [power]: C8.1 C10_SUPERCAP.2 R_CAPACITOR.2 U3.14
VUSB [power]: J2.A4 J2.A9 J2.B4 J2.B9 PFMF.050.1.1

## Tracks (layer width: path | path; a pad name or v marks a point on that pad's centre or on a via)
3V3
  Top 0.3: 44.96,105.79 44.96,107.82 45.72,108.58 R_RESET.2 | 44.96,105.79 47.88,102.87 IC1.2 48.26,102.93 51.24,102.93 56.9,108.58 59.44,108.58 R_CHANGE.2 | 35.05,58.36 34.8,58.1 34.8,57.28 32.96,55.44 32.96,55.24 U1.3 | 35.05,58.36 40.13,58.36 40.7,57.78 U1.8 | U1.7 40.7,56.52 40.7,57.66 U1.8 | 35.05,58.36 34.99,58.48 34.99,61.98 6.54,90.42 J4.P4 5.84,90.55 6.48,90.55 8.83,92.9 8.83,99.57 C9.1 8.89,99.69 10.16,100.97 R10.2 10.29,101.03 17.84,108.58 19.68,108.58 R_BOOT.2 19.81,108.52 21.72,106.62 44.13,106.62 44.96,105.79 | 128.4,43.88 126.11,41.59 120.97,41.59 120.02,40.64 C1_BAT2.1 119.89,40.7 111.12,40.7 94.11,57.72 R1-PINH1.2 93.98,57.85 88.84,57.85 88.65,58.04 87.69,58.04 | 128.4,43.88 128.4,44.07 IC4.5 | J3.3 165.1,19.81 153.92,19.81 132.08,41.66 C3.+ 131.95,41.72 129.86,43.81 128.52,43.81 128.4,43.88 | 87.44,60.52 87.44,62.23 D7.2 | 87.44,60.52 87.69,60.26 87.69,58.04 | 87.69,58.04 87.69,57.85 87,57.15 U3.2 | 85.12,57.82 85.09,57.78 85.09,45.09 85.6,44.58 R2-PINH1.2 85.66,44.45 85.66,41.85 77.47,33.66 TP16.TP 77.53,32.89 78.49,31.94 78.49,29.21 79.25,28.45 | 85.12,57.82 86.36,59.05 86.36,60.26 86.55,60.45 87.31,60.45 87.44,60.52 | U2.2 8.76,48.39 8.76,48.01 12.95,43.81 19.05,43.81 R1.1 19.18,43.88 21.08,43.88 27.37,50.16 31.56,50.16 R5.2 31.69,50.1 32.38,49.4 32.38,46.74 44.39,34.73 44.39,33.85 R8.2 44.45,33.72 46.99,33.72 R7.2 47.05,33.59 48.26,32.38 R6.2 48.39,32.32 52.07,28.64 73.53,28.64 R9.2 73.66,28.57 74.93,27.3 76.2,27.3 R_CL1.1 76.33,27.37 76.9,27.94 77.47,27.94 77.74,28.21 78.31,28.21 78.54,28.45 79.25,28.45 | 85.12,57.82 84.9,58.04 78.99,58.04 78.8,57.85 40.83,57.85 U1.8
  Top 0.3: Q2.3 79.76,27.94 79.25,28.45
32KHZ  (via drill 0.3)
  Top 0.15: v87.06,45.97 87.06,44.45 R2-PINH1.1 | v89.72,54.36 89.72,55.24 88.27,56.71 U3.1 | v33.15,50.99 19.94,50.99 17.65,48.7 17.65,48.45 U2.9 | v84.58,52.13 v34.29,52.13
  Bottom 0.15: v87.06,45.97 89.72,48.64 89.72,52.13 | v89.72,54.36 89.72,52.13 | v34.29,52.13 v33.15,50.99 | 89.72,52.13 v84.58,52.13
DN
  Top 0.15: 160.4,53.85 160.66,53.59 161.8,53.59 J2.B7 | 160.4,53.85 160.4,54.23 160.72,54.55 161.8,54.55 J2.A7 | 160.4,53.85 157.48,53.85 156.78,53.15 156.78,50.16 155.26,48.64 154.94,48.64 D1.1
DP  (via drill 0.3)
  Top 0.15: v160.84,54.04 161.8,54.04 J2.A6 | J2.B6 161.8,54.99 v160.84,54.99 158.18,54.99 154.94,51.75 154.94,50.48 D1.3
  Bottom 0.15: v160.84,54.99 v160.84,54.04
EPD_3V3
  Top 0.3: J1.16 83.31,15.43 83.31,23.71 83.73,24.14 83.76,24.14 83.82,24.19 84.52,24.19 | C7.1 83.19,26.67 83.31,26.54 83.31,25.4 84.52,24.19 | Q2.2 77.79,26.99 82.8,26.99 83.06,26.73 C7.1 | TP17.TP 94.61,24.13 94.55,24.19 85.09,24.19 84.52,24.19 | L1.2 83.82,28.07 82.87,27.11 C7.1
EPD_3V3_C
  Top 0.3: Q2.1 77.72,28.83 77.53,28.64 76.2,28.64 R_CL1.2 76.07,28.7 74.8,28.7 57.85,45.66 49.66,45.66 TP13.TP 44.2,51.05 34.61,51.05 20.19,65.47 20.19,65.85 U2.18
EPD_BUSY  (via drill 0.3)
  Top 0.15: v88.96,19.88 86.87,17.78 86.87,15.43 J1.9 | v55.5,11.75 16.19,11.75 TP9.TP 11.43,16.57 v10.03,17.97 | v10.03,57.02 10.03,65.85 U2.26
  Bottom 0.15: v88.96,19.88 88.96,19.68 91,17.65 91,15.75 87,11.75 v55.5,11.75 | v10.03,17.97 v10.03,57.02
EPD_CS  (via drill 0.3)
  Top 0.15: R9.1 73.66,27.24 73.79,27.24 76.9,24.13 D6.2 76.96,24.19 v81.92,24.19 | v84.14,13.84 85.28,14.99 85.28,15.37 J1.12 | v76.14,12.19 75.69,12.19 TP10.TP | v21.84,45.4 20.19,47.05 20.19,48.39 U2.11
  Bottom 0.15: v21.84,45.4 55.05,12.19 v76.14,12.19 81.22,12.19 82.87,13.84 v84.14,13.84 88.65,13.84 90.68,15.88 90.68,17.53 84.01,24.19 v81.92,24.19
EPD_DC  (via drill 0.3)
  Top 0.15: v80.01,13.4 84.33,13.4 85.79,14.86 85.79,15.37 J1.11 | v54.48,13.4 29.78,13.4 TP11.TP 20.32,22.92 v12.57,30.67 | v12.57,44.96 12.57,48.39 U2.5
  Bottom 0.15: v54.48,13.4 v80.01,13.4 | v12.57,30.67 v12.57,44.96
EPD_RST
  Top 0.15: J1.10 86.3,15.37 86.3,14.92 84.33,12.95 79.82,12.95 74.68,18.1 44.13,18.1 TP12.TP 25.08,29.21 6.73,47.56 6.73,53.09 16.32,62.67 16.32,65.85 U2.21
FLASH_CS  (via drill 0.3)
  Top 0.15: v30.92,49.53 31.56,48.9 R5.1 | v32.32,57.21 32.89,57.78 U1.1 | v35.18,50.55 34.92,50.29 34.29,50.29 D9.2 | v22.29,49.53 21.46,48.7 21.46,48.45 U2.12
  Bottom 0.15: v35.18,50.55 35.18,54.17 32.26,57.09 v32.32,57.21 30.92,55.82 v30.92,49.53 v22.29,49.53
GDR  (via drill 0.3)
  Top 0.15: v89.92,16.19 90.3,15.81 90.3,15.43 J1.2 | v74.99,17.14 74.36,16.51 R4.2 74.3,16.57 73.09,17.78 70.04,17.78 69.22,16.95 69.22,16.76 Q3.1
  Bottom 0.15: v89.92,16.19 84.9,16.19 84.77,16.07 81.79,16.07 80.26,17.59 75.44,17.59 v74.99,17.14
GND  (via drill 0.3)
  Top 0.15: U2.29_3 11.94,56.83 13.08,56.83 U2.29_6 13.14,56.83 13.14,55.69 U2.29_5 13.21,55.69 14.35,55.69 U2.29_8 14.41,55.69 14.41,56.83 U2.29_9 14.48,56.9 28.26,56.9 33.59,51.56 33.59,49.53 34.29,48.83 D9.1 34.29,45.4 40.48,39.21 | U2.29_1 11.94,54.42 11.94,55.63 U2.29_2 11.94,55.69 11.94,56.77 U2.29_3 | U2.29_1 12,54.42 13.14,54.42 U2.29_4 13.21,54.42 14.35,54.42 U2.29_7 | U2.1 7.49,48.45 7.49,51.12 10.73,54.36 11.87,54.36 U2.29_1 | v33.85,53.98 U1.4 | v34.73,53.98 34.92,53.98 U1.9 | 40.48,39.21 43.62,36.07 44.39,36.07 D12.1 44.45,36.07 44.9,36.07 45.09,35.88 46.29,35.88 46.48,36.07 D11.1 46.55,36.07 48.26,36.07 D10.1 | v39.81,38.54 39.81,38.48 38.16,36.83 TP5.TP TP4.TP 42.67,33.02 44.01,31.69 48.51,31.69 54.42,25.78 73.72,25.78 75.37,24.13 D6.1 75.44,24.13 75.44,23.43 | 40.48,39.21 v40.58,39.31 | 52.58,102.55 50.48,102.55 49.91,101.98 48.13,101.98 IC1.3 48.07,101.92 18.35,101.92 14.8,98.36 D8.1 | 52.58,102.55 53.53,103.5 C_DELAY.2 | C10.2 67.31,108.58 66.17,108.58 65.53,107.95 RESET_BUTTON.2 65.47,107.95 62.04,107.95 RESET_BUTTON.1 | CHANGE_BUTTON.1 47.31,107.95 50.74,107.95 CHANGE_BUTTON.2 50.8,107.95 51.44,108.58 53.34,108.58 C5.2 53.4,108.58 54.29,109.47 60.13,109.47 61.66,107.95 61.98,107.95 RESET_BUTTON.1 | 52.58,102.55 52.58,102.11 53.02,101.66 55.44,101.66 61.66,107.89 RESET_BUTTON.1 | D8.1 14.73,98.36 14.73,92.77 16.38,91.12 J4.G2 16.45,91.06 17.21,90.3 17.21,87.25 16.45,86.49 16.45,85.41 J4.G1 | C6..2 27.24,108.58 26.42,108.58 25.78,107.95 BOOT_BUTTON.2 25.72,107.95 22.29,107.95 BOOT_BUTTON.1 22.23,107.89 20.95,107.89 20.38,108.46 20.38,109.03 20.26,109.16 17.14,109.16 10.51,102.52
  Top 0.15: 10.51,102.52 8.95,100.97 C9.2 8.89,100.97 8.57,100.97 3.17,95.57 J4.G4 3.17,95.5 3.17,95.19 5.65,92.71 5.78,92.71 J4.P6 5.65,92.65 2.16,89.15 2.16,82.42 J4.G3 2.16,82.36 7.43,77.09 7.43,65.91 U2.28 7.49,65.85 v7.49,62.1 | v11.56,101.54 14.67,98.42 D8.1 | v10.6,102.49 10.54,102.49 10.51,102.52 | v11.94,57.66 11.94,56.96 U2.29_3 | C10_SUPERCAP.1 95.25,49.34 101.98,49.34 111.38,39.94 120.4,39.94 121.09,40.64 C1_BAT2.2 121.6,40.64 v122.05,41.08 | C10_SUPERCAP.1 95.19,49.34 93.53,47.69 92.71,47.69 C8.2 92.65,47.69 91.5,48.83 v89.28,48.83 | U3.13 84.45,48.7 v84.58,48.83 | 87.34,29.5 89.6,31.75 D3.1 | 87.34,29.5 87.09,29.24 84.52,26.67 C7.2 | EPD_C8.2 84.33,23.56 86.36,23.56 EPD_C7.2 86.42,23.56 88.46,23.56 EPD_C6.2 88.52,23.56 90.17,23.56 EPD_C5.2 90.23,23.56 91.95,23.56 EPD_C2.2 92.08,23.5 93.92,23.5 EPD_C1.2 93.98,23.5 94.3,23.18 94.87,23.18 95.25,22.8 96.52,22.8 | 96.2,25.34 98.3,25.34 99,24.64 99,23.62 98.17,22.8 96.52,22.8 | 96.2,25.34 91,25.34 88.01,28.32 87.34,28.99 87.34,29.5 | EPD_C9.2 82.55,23.56 80.01,23.56 EPD_C10.2 79.95,23.5 77.6,23.5 77.53,23.43 75.44,23.43 | 75.44,21.02 76.2,21.02 EPD_C11.2 76.26,20.95 v80.07,17.14 | 75.44,21.02 73.66,21.02 EPD_C12.2 | 75.44,21.02 75.44,23.43 | v83.25,14.61 82.87,14.99 82.87,15.37 J1.17 | v86.87,14.61 87.31,15.05 87.31,15.37 J1.8 | R4.1 71.82,16.51 70.87,17.46 70.17,17.46 69.66,16.95 69.66,16.07 68.52,14.92 67.88,14.92 67.18,14.22 R2.1 67.12,14.22 67.12,12.19 67.82,11.49 SJ1.1 67.82,11.24 68.64,10.41 70.61,10.41 73.09,12.89 78.3,12.89 J1.MP2 78.36,12.89 78.61,12.64 v78.93,12.64 78.99,12.64 79.31,12.32 87.57,12.32 88.14,12.89 91.82,12.89 J1.MP1 91.89,12.95 91.89,18.99 94.68,21.78 95.5,21.78 96.52,22.8
  Top 0.15: 96.2,25.34 96.2,47.94 95.95,48.2 95.95,49.28 C10_SUPERCAP.1 | C2_BAT.2 127,49.97 126.3,49.28 126.3,49.02 125.73,48.45 | C1_BAT1.2 135.89,43.88 132.91,43.88 132.14,44.64 C3.- 132.08,44.7 130.05,44.7 126.3,48.45 125.73,48.45 | U4.9 140.27,56.45 140.02,56.45 U4.4 139.95,56.39 v139.45,55.88 | U4.6 141.92,56.96 141.22,56.96 141.03,57.15 U4.9 | U4.1 140.02,57.85 140.34,57.85 140.97,57.21 U4.9 | 119.47,43.4 120.14,42.74 122.05,42.74 | 119.47,43.4 119.13,43.75 118.11,43.75 R1_PWRUSB.1 118.05,43.81 117.86,43.81 115.32,46.35 115.32,50.16 116.14,50.99 116.14,54.61 R2_BAT.1 116.2,54.67 119.32,57.78 131.83,57.78 | 122.05,42.74 125.09,42.74 125.54,43.18 IC4.2 | 131.83,57.78 135.89,57.78 C1_BAT.2 | MCP73831.2 131.06,54.61 v131.83,55.37 | v131.83,57.72 131.83,57.78 | 125.73,48.45 125.22,48.45 120.78,44.01 120.08,44.01 119.47,43.4 | C1.2 157.48,5.78 154.94,5.78 C2.2 154.94,8.95 151.19,12.7 SENSOR2.5 151,12.76 151.19,12.76 151.7,13.27 151.7,13.84 | 151.7,13.84 151.19,14.35 151,14.35 SENSOR2.7 | 151.7,13.84 151.76,13.84 153.03,15.11 153.8,15.11 SENSOR2.1 153.86,15.24 163.83,15.24 165.99,17.4 165.99,20.19 165.42,20.77 165.1,20.77 J3.4 165.04,20.83 165.04,33.15 155.64,42.55 C5_USB.2 155.57,42.55 155.57,44.45 C4_USB.2 155.57,44.51 155.57,45.34 160.84,50.61 v160.84,50.67 161.54,50.67 | J2.B1 161.86,57.4 161.86,57.59 J2.A12 161.8,57.72 161.8,58.8 162.37,59.37 J2.MP4 162.43,59.44 166.31,59.44 J2.MP2 166.31,59.37 166.31,49.28 J2.MP1 166.31,49.21 162.43,49.21 J2.MP3 162.37,49.21 162.37,49.78 161.54,50.61 161.54,50.67 | R2-USB.2 149.86,50.16 151.51,50.16 152.15,49.53 D1.5 v153.48,49.53
  Top 0.15: v160.02,51.37 157.48,51.37 R2-USB1.1 | 161.54,50.67 161.8,50.93 J2.A1 161.86,50.99 161.86,51.24 J2.B12 | v122.05,42.67 122.05,42.74
  Bottom 0.15: v33.85,53.98 v34.73,53.98 34.73,45.21 40.58,39.37 v40.58,39.31 v39.81,38.54 | v10.6,102.49 v11.56,101.54 | v7.49,62.1 v11.94,57.66 | v89.28,48.83 v84.58,48.83 | v86.87,14.61 v83.25,14.61 83.19,14.61 82.52,13.94 | 82.52,13.94 81.22,12.64 v78.93,12.64 | v80.07,17.14 80.07,16.38 82.52,13.94 | v131.83,57.72 131.83,55.88 | 131.83,55.88 v131.83,55.37 | 131.83,55.88 v139.45,55.88 147.32,55.88 153.67,49.53 | v160.84,50.67 160.15,51.37 v160.02,51.37 159.96,51.37 158.12,49.53 153.73,49.53 153.67,49.53 | v122.05,42.67 v122.05,41.08 | 153.67,49.53 v153.48,49.53
  pour Top: 6.41,48.22 6.39,48.2 6.37,48.18 0.08,48.18 0.08,0.08 75.92,0.08 75.92,10.02 75.94,10.04 75.96,10.06 75.98,10.08 94.22,10.08 94.24,10.06 94.26,10.04 94.28,10.02 94.28,0.08 170.12,0.08 170.12,67.12 92.18,67.12 92.16,67.14 92.14,67.16 92.12,67.18 92.12,111.12 67.39,111.12 67.39,110.2 67.37,110.18 67.35,110.16 67.33,110.14 20.3,110.14 20.28,110.16 20.26,110.18 20.24,110.2 20.24,111.12 0.08,111.12 0.08,66.12 6.37,66.12 6.39,66.1 6.41,66.08 6.43,66.06 6.43,48.24
  pour Bottom: 6.41,48.22 6.39,48.2 6.37,48.18 0.08,48.18 0.08,0.08 75.92,0.08 75.92,10.02 75.94,10.04 75.96,10.06 75.98,10.08 94.22,10.08 94.24,10.06 94.26,10.04 94.28,10.02 94.28,0.08 170.12,0.08 170.12,67.12 92.18,67.12 92.16,67.14 92.14,67.16 92.12,67.18 92.12,111.12 67.39,111.12 67.39,110.2 67.37,110.18 67.35,110.16 67.33,110.14 20.3,110.14 20.28,110.16 20.26,110.18 20.24,110.2 20.24,111.12 0.08,111.12 0.08,66.12 6.37,66.12 6.39,66.1 6.41,66.08 6.43,66.06 6.43,48.24
GPIO8
  Top 0.15: R1.2 19.05,48.26 18.92,48.39 U2.10
I2C_PW  (via drill 0.3)
  Top 0.15: SENSOR2.2 153.8,14.35 152.78,14.35 152.53,14.1 152.53,11.81 158.18,6.16 158.18,5.21 157.48,4.51 C1.1 157.48,4.45 154.94,4.45 C2.1 154.88,4.45 153.61,5.71 152.46,5.71 R1-PINH.2 152.4,5.78 149.86,5.78 R2-PINH.2 150.18,5.84 150.18,13.02 150.69,13.53 SENSOR2.6 150.94,13.59 150.69,13.59 150.18,14.1 150.18,14.67 | 150.18,14.67 150.62,15.11 150.94,15.11 SENSOR2.8 | v22.29,64.77 21.46,65.6 21.46,65.85 U2.17 | v96.39,48.9 101.98,48.9 136.21,14.67 150.18,14.67
  Bottom 0.15: v22.29,64.77 67.18,64.77 76.83,55.12 90.17,55.12 v96.39,48.9
INT_RTC  (via drill 0.3)
  Top 0.15: v94.81,56.26 94.61,56.45 93.98,56.45 R1-PINH1.1 | v96.71,56.26 96.9,56.26 TP15.TP | v17.4,47.05 16.38,48.07 16.38,48.39 U2.8 | v85.6,54.67 85.6,56.58 85.72,56.71 U3.3
  Bottom 0.15: v94.81,56.26 v96.71,56.26 96.71,49.21 96.84,49.09 96.84,48.7 96.58,48.45 96.2,48.45 90.17,54.48 90.17,54.55 89.92,54.8 85.79,54.8 85.66,54.67 v85.6,54.67 42.42,54.67 41.4,53.66 41.4,39.5 40.01,38.1 39.62,38.1 30.67,47.05 v17.4,47.05
IO/BOOT  (via drill 0.3)
  Top 0.15: C6..1 27.3,107.31 27.3,107.5 27.94,108.14 27.94,109.03 27.62,109.35 25.78,109.35 BOOT_BUTTON.3 25.72,109.41 22.29,109.41 BOOT_BUTTON.4 22.23,109.41 v21.14,108.33 | v20.51,107.06 20.32,107.25 19.75,107.25 R_BOOT.1 | v20.51,75.69 23.94,72.26 23.94,65.91 U2.15
  Bottom 0.15: v21.14,108.33 20.51,107.7 v20.51,107.06 v20.51,75.69
IO/CHANGE  (via drill 0.3)
  Top 0.15: CHANGE_BUTTON.4 47.31,109.41 50.74,109.41 CHANGE_BUTTON.3 50.8,109.41 51.5,109.41 v51.88,109.03 | v60.39,107.25 59.5,107.25 R_CHANGE.1 | v66.48,107.12 67.18,107.12 67.31,107.25 C10.1 | v21.59,73.98 13.84,66.23 13.84,65.91 U2.23
  Bottom 0.15: v66.48,107.12 66.36,107.25 v60.39,107.25 60.33,107.25 56.99,103.92 55.91,102.84 | v21.59,73.98 27.05,73.98 55.91,102.84 | v51.88,109.03 55.69,105.22 55.91,105 55.91,102.84
MISO  (via drill 0.3)
  Top 0.15: v7.56,92.39 6.16,93.79 6.03,93.79 J4.P7 | v8.7,75.25 8.7,65.91 U2.27 | v43.62,33.21 44.45,32.38 R8.1 | v43.62,36.7 44.45,37.53 D12.2 44.39,37.59 40.96,41.02 v40.96,49.66 | v33.66,56.96 33.21,56.52 U1.2 32.89,56.58 32.77,56.71 v31.18,56.71 | TP6.TP 49.97,26.67 v45.4,31.24
  Bottom 0.15: v7.56,92.39 7.56,90.81 8.7,89.66 v8.7,75.25 8.7,75.06 27.75,56.01 30.48,56.01 v31.18,56.71 | v43.62,36.7 v43.62,33.21 43.62,33.15 45.4,31.37 v45.4,31.24 | v40.96,49.66 v33.66,56.96
MOSI  (via drill 0.3)
  Top 0.15: J1.14 84.33,15.37 84.33,15.05 83.44,14.16 79.06,14.16 74.42,18.8 71.63,18.8 64.96,25.46 46.93,25.46 TP7.TP v45.72,28.77 | v46.16,33.21 46.99,32.38 R7.1 | v45.28,36.32 46.48,37.53 D11.2 | U1.5 41.34,53.98 v41.85,53.47 | v16.57,46.61 15.11,48.07 15.11,48.39 U2.7 | v5.27,88.65 5.97,89.34 J4.P3
  Bottom 0.15: v41.85,53.47 41.85,39.81 42.01,39.66 | 42.01,39.66 45.28,36.39 v45.28,36.32 46.16,35.43 v46.16,33.21 46.16,31.37 45.72,30.92 v45.72,28.77 | 42.01,39.66 40.13,37.78 39.5,37.78 30.67,46.61 v16.57,46.61 16.57,56.33 5.27,67.63 v5.27,88.65
N$1
  Top 0.15: R2-USB1.2 157.48,52.77 160.97,52.77 161.23,53.02 161.8,53.02 J2.A5
N$2  (via drill 0.3)
  Top 0.15: v151.45,49.02 151.32,48.9 149.86,48.9 R2-USB.1 | v160.84,55.63 161.23,56.01 161.8,56.01 J2.B5
  Bottom 0.15: v151.45,49.02 159.83,49.02 161.29,50.48 161.29,55.18 v160.84,55.63
N$3  (via drill 0.3)
  Top 0.15: CHG_LED.C 123.89,55.88 v124.46,56.45 | v125.86,55.05 125.6,55.05 125.16,54.61 R1_BAT.2
  Bottom 0.15: v125.86,55.05 v124.46,56.45
N$4
  Top 0.15: 126.3,43.56 126.3,42.8 125.79,42.29 125.6,42.29 IC4.3 | 126.3,43.56 125.79,44.07 125.6,44.07 IC4.1 125.54,44.07 125.41,44.07 124.78,43.43 120.65,43.43 D2.1 | 126.3,43.56 126.36,43.56 127.44,44.64 129.54,44.64 130.75,43.43 132.72,43.43 133.6,42.55 135.89,42.55 C1_BAT1.1 135.95,42.55 136.97,42.55 140.91,46.48 140.91,48.77 139.38,50.29 139.38,51.05 Q1.2
N$5
  Top 0.15: R2_BAT.2 117.47,54.61 117.47,51.88 115.63,50.04 115.63,46.48 117.6,44.51 120.84,44.51 126.3,49.97 126.3,51.75 128.21,53.66 MCP73831.5
N$6  (via drill 0.3)
  Top 0.15: v123.44,53.78 123.76,54.1 123.76,54.61 R1_BAT.1 | v130.43,53.02 130.43,53.28 130.81,53.66 MCP73831.1
  Bottom 0.15: v123.44,53.78 129.67,53.78 v130.43,53.02
N$7
  Top 0.15: J1.15 83.88,15.43 83.88,16.45 89.6,22.16 90.17,22.16 EPD_C5.1
N$8
  Top 0.15: J1.4 89.34,17.53 93.98,22.16 EPD_C1.1
N$9  (via drill 0.3)
  Top 0.15: v82.8,16.95 82.36,16.51 82.36,15.43 J1.18 | v86.49,20.64 86.93,20.64 88.46,22.16 EPD_C6.1
  Bottom 0.15: v86.49,20.64 v82.8,16.95
N$10
  Top 0.15: C4.1 95.25,31.11 93.85,31.11 93.22,31.75 D3.2 93.34,31.56 89.72,27.94 D4.1
N$11  (via drill 0.3)
  Top 0.15: v82.55,14.61 79.76,14.61 79.38,14.99 79.38,15.37 J1.24 | v74.49,20.51 73.66,19.68 EPD_C12.1
  Bottom 0.15: v82.55,14.61 83.69,15.75 90.11,15.75 90.36,16 90.36,17.4 85.85,21.91 75.88,21.91 v74.49,20.51
N$12
  Top 0.15: C_DELAY.1 53.59,102.23 53.59,102.42 58.8,107.63 58.8,107.76 59.05,108.01 60.01,108.01 60.13,108.14 60.13,109.03 60.01,109.16 56.33,109.16 50.99,103.82 IC1.5
N$13
  Top 0.15: J1.22 80.39,15.43 80.39,16.83 80.52,16.95 80.52,21.65 80.01,22.16 EPD_C10.1
N$15  (via drill 0.3)
  Top 0.15: v81.34,18.99 J1.20 | v83.82,21.46 83.82,21.72 84.26,22.16 EPD_C8.1
  Bottom 0.15: v83.82,21.46 v81.34,18.99
N$16  (via drill 0.3)
  Top 0.15: v81.85,17.65 81.85,15.43 J1.19 | v85.66,21.46 86.36,22.16 EPD_C7.1
  Bottom 0.15: v85.66,21.46 v81.85,17.65
N$17
  Top 0.15: J1.5 88.9,15.43 88.9,19.11 91.95,22.16 EPD_C2.1
N$18
  Top 0.15: D7.1 85.34,62.23 85.34,60.01 85.66,59.69 R_CAPACITOR.1
PREVGH  (via drill 0.3)
  Top 0.15: J1.21 80.9,15.43 80.9,20.51 82.55,22.16 EPD_C9.1 82.49,22.23 v81.85,22.86 | v79.57,30.42 79.57,33.27 82.04,35.75 82.04,36.83 D5.2
  Bottom 0.15: v79.57,30.42 81.47,28.51 81.47,23.24 v81.85,22.86
PREVGL  (via drill 0.3)
  Top 0.15: J1.23 79.82,15.43 79.82,16 76.2,19.62 EPD_C11.1 76.14,19.62 75.63,19.11 73.09,19.11 72.96,19.24 v72.96,24.45 | v90.68,27.94 D4.2
  Bottom 0.15: v90.68,27.94 82.68,27.94 79.76,30.86 79.38,30.86 v72.96,24.45
RESE
  Top 0.15: J1.3 89.79,15.37 89.79,14.99 87.44,12.64 79.57,12.64 78.68,13.53 71.25,13.53 71.12,13.4 R3.2 71.25,13.59 70.55,14.29 70.55,16.7 Q3.2
RESE'
  Top 0.15: R3.1 71.12,12 69.91,12 SJ1.2 69.91,12.06 68.39,13.59 68.39,14.22 R2.2
RESET  (via drill 0.3)
  Top 0.15: RESET_BUTTON.3 65.47,109.41 62.04,109.41 RESET_BUTTON.4 61.98,109.47 v60.77,109.47 | R_RESET.1 45.72,106.17 47.47,104.43 | 47.47,104.43 48.07,103.82 IC1.1 48.2,103.82 51.63,107.25 53.34,107.25 C5.1 | v10.92,53.91 10.03,53.02 10.03,48.45 U2.3 | v20.07,64.77 v13.78,58.48 | v47.43,104.39 47.47,104.43
  Bottom 0.15: v10.92,53.91 10.92,55.63 v13.78,58.48 | v20.07,64.77 20.07,74.61 47.43,101.98 v47.43,104.39 47.43,105.22 51.69,109.47 v60.77,109.47
RTC_RST
  Top 0.15: U3.4 84.45,56.39 81.09,53.02 35.05,53.02 34.29,53.78 34.29,54.17 34.04,54.42 32.77,54.42 22.73,64.45 22.73,65.85 U2.16
RX
  Top 0.15: TP2.TP 12.57,68.45 12.57,65.91 U2.24
SCK  (via drill 0.3)
  Top 0.15: v84.58,16.51 84.84,16.26 J1.13 | v49.09,32.83 48.26,33.66 R6.1 48.26,33.72 48.96,34.42 48.96,36.64 48.26,37.34 D10.2 | v42.55,53.47 40.77,55.24 U1.6 40.7,55.31 v40.13,55.88 | v28.07,56.45 21.59,56.45 13.84,48.7 13.84,48.45 U2.6 | v13.84,71.12 4.83,80.14 4.83,90.93 5.46,91.57 5.97,91.57 J4.P5 | TP8.TP 42.99,26.67 v46.16,29.84
  Bottom 0.15: v84.58,16.51 81.79,16.51 78.8,19.49 62.42,19.49 v49.09,32.83 | v42.55,53.47 42.55,39.69 49.09,33.15 v49.09,32.83 | v40.13,55.88 38.35,57.66 31.5,57.66 30.29,56.45 v28.07,56.45 27.75,56.45 13.84,70.36 v13.84,71.12 | v46.16,29.84 49.09,32.77 v49.09,32.83
SCL  (via drill 0.3)
  Top 0.15: 155.61,11.02 SENSOR2.4 | 155.61,11.02 158.81,7.81 158.81,4.19 158.18,3.56 152.15,3.56 151.32,4.38 149.86,4.38 R2-PINH.1 | v144.53,47.94 144.53,55.12 142.3,57.34 141.99,57.34 U4.7 | v163.39,18.8 164.34,17.84 165.1,17.84 J3.1 | v159.38,14.8 155.61,11.02 | v22.92,67.44 18.86,67.44 17.65,66.23 17.65,65.91 U2.20 | v89.15,47.43 88.27,47.43 U3.16
  Bottom 0.15: v159.38,14.8 v163.39,18.8 163.39,29.08 v144.53,47.94 97.85,47.94 97.22,48.58 97.16,48.58 | v22.92,67.44 86.17,67.44 97.16,56.45 97.16,48.58 | 97.16,48.58 96.01,47.43 v89.15,47.43
SDA  (via drill 0.3)
  Top 0.15: v144.97,29.53 144.97,45.53 | 144.97,45.53 144.97,55.18 142.3,57.85 141.99,57.85 U4.8 | SENSOR2.3 153.8,13.59 153.48,13.91 v152.97,13.91 153.1,13.84 153.1,12.51 158.5,7.11 158.5,4.32 158.05,3.87 154.37,3.87 153.86,4.38 152.4,4.38 R1-PINH.1 | v164.02,18.8 J3.2 | v23.3,66.99 19.68,66.99 18.92,66.23 18.92,65.91 U2.19 | v79.12,53.47 v77.03,55.56 | v86.36,46.23 86.36,46.74 87,47.37 U3.15 | v140.59,45.53 144.97,45.53
  Bottom 0.15: v144.97,29.53 144.97,21.91 v152.97,13.91 159.13,13.91 v164.02,18.8 | v23.3,66.99 65.6,66.99 v77.03,55.56 | v79.12,53.47 v86.36,46.23 86.36,46.04 86.87,45.53 v140.59,45.53
SRC  (via drill 0.3)
  Top 0.15: 86.61,35.81 86.14,36.29 85.6,36.83 D5.1 | 86.61,35.81 89.98,32.45 95.25,32.45 C4.2 | v69.85,19.94 Q3.3 | v79.63,29.72 79.63,29.84 L1.1 83.88,34.04 85.25,35.4 85.66,35.81 86.61,35.81
  Bottom 0.15: v79.63,29.72 v69.85,19.94
SS_SD  (via drill 0.3)
  Top 0.15: D8.2 13.21,98.42 12,99.63 10.16,99.63 R10.1 10.16,91.38 v8.26,89.47 | v17.02,55.88 11.3,50.16 11.3,48.45 U2.4 | v7.11,87.57 6.41,88.27 J4.P2
  Bottom 0.15: v17.02,55.88 17.02,66.29 7.11,76.2 v7.11,87.57 7.11,87.63 8.26,88.77 v8.26,89.47
TX
  Top 0.15: TP1.TP 11.24,70.04 11.24,65.91 U2.25
USB_D+  (via drill 0.3)
  Top 0.15: v145.41,45.53 145.41,46.86 149.29,50.74 150.43,50.74 150.69,50.48 152.4,50.48 D1.4 | v21.97,46.16 23.94,48.13 23.94,48.39 U2.14
  Bottom 0.15: v145.41,45.53 141.67,45.53 107.44,11.3 55.31,11.3 21.4,45.21 21.4,45.59 v21.97,46.16
USB_D-  (via drill 0.3)
  Top 0.15: v145.86,45.97 148.08,45.97 150.69,48.58 152.4,48.58 D1.6 | v33.91,52.58 v42.99,52.58 | v24.77,49.09 24.45,49.4 23.43,49.4 22.73,48.7 22.73,48.45 U2.13
  Bottom 0.15: v145.86,45.97 141.67,45.97 140.78,45.09 50.48,45.09 v42.99,52.58 | v33.91,52.58 33.91,52.39 31.37,49.85 31.37,49.34 31.11,49.09 v24.77,49.09
VBAT
  Top 0.3: C2_BAT.1 127,48.9 129.92,51.82 130.05,51.75 130.81,51.75 | MCP73831.3 130.81,55.5 130.43,55.5 129.92,54.99 129.92,53.34 129.93,53.34 129.93,52.81 130.81,51.93 130.81,51.75 | U4.2 140.02,57.34 140.02,56.96 U4.3 139.89,56.83 139.51,56.83 138.43,55.75 Q1.3 138.49,53.02 138.49,50.67 | TP3.TP 139.7,49.47 138.49,50.67 | 130.81,51.75 135.51,51.75 136.97,50.29 138.05,50.29 138.37,50.61 138.49,50.67
VBUS
  Top 0.3: 154.56,49.53 D1.2 154.43,49.59 154.08,49.94 | PFMF.050.1.2 154.37,39.37 152.27,37.27 150.56,37.27 150.37,37.47 150.37,41.27 151.51,42.42 154.18,42.42 C5_USB.1 154.31,42.55 154.31,44.45 C4_USB.1 154.24,44.58 153.99,44.83 153.99,48.96 153.99,49.85 154.08,49.94 | D2.2 120.65,45.47 120.33,45.15 118.11,45.15 R1_PWRUSB.2 118.05,45.28 118.05,48.32 | TP14.TP 118.05,48.32 | 136.75,55.59 135.89,56.45 C1_BAT.1 135.76,56.39 130.37,56.39 129.6,55.63 128.33,55.63 MCP73831.4 128.21,55.56 127.89,55.88 CHG_LED.A 125.09,55.82 124.46,55.18 124.46,54.04 118.81,48.39 118.17,48.39 118.05,48.32 | 136.75,55.59 137.48,54.86 137.48,51.12 Q1.1 | 154.08,49.94 153.35,50.67 153.35,50.86 145.86,58.36 139.51,58.36 136.75,55.59
VRTC
  Top 0.3: C10_SUPERCAP.2 95.25,47.12 94.49,46.35 92.71,46.35 C8.1 92.58,46.42 90.93,46.42 88.58,48.77 86.36,48.77 | 86.36,48.77 86.36,48.07 85.72,47.43 U3.14 | 86.36,48.77 86.36,57.78 87,58.42 87,59.69 R_CAPACITOR.2
VUSB
  Top 0.3: J2.A9 161.86,56.83 161.86,56.58 J2.B4 161.99,56.52 162.5,56.52 162.69,56.33 162.69,52.26 162.5,52.07 161.99,52.07 J2.B9 161.86,52.01 161.86,51.75 J2.A4 161.73,51.69 161.1,51.69 154.94,45.53 154.94,41.91 152.4,39.37 PFMF.050.1.1